# EAGLE board p2b-001 (EAGLE 9.6.2)
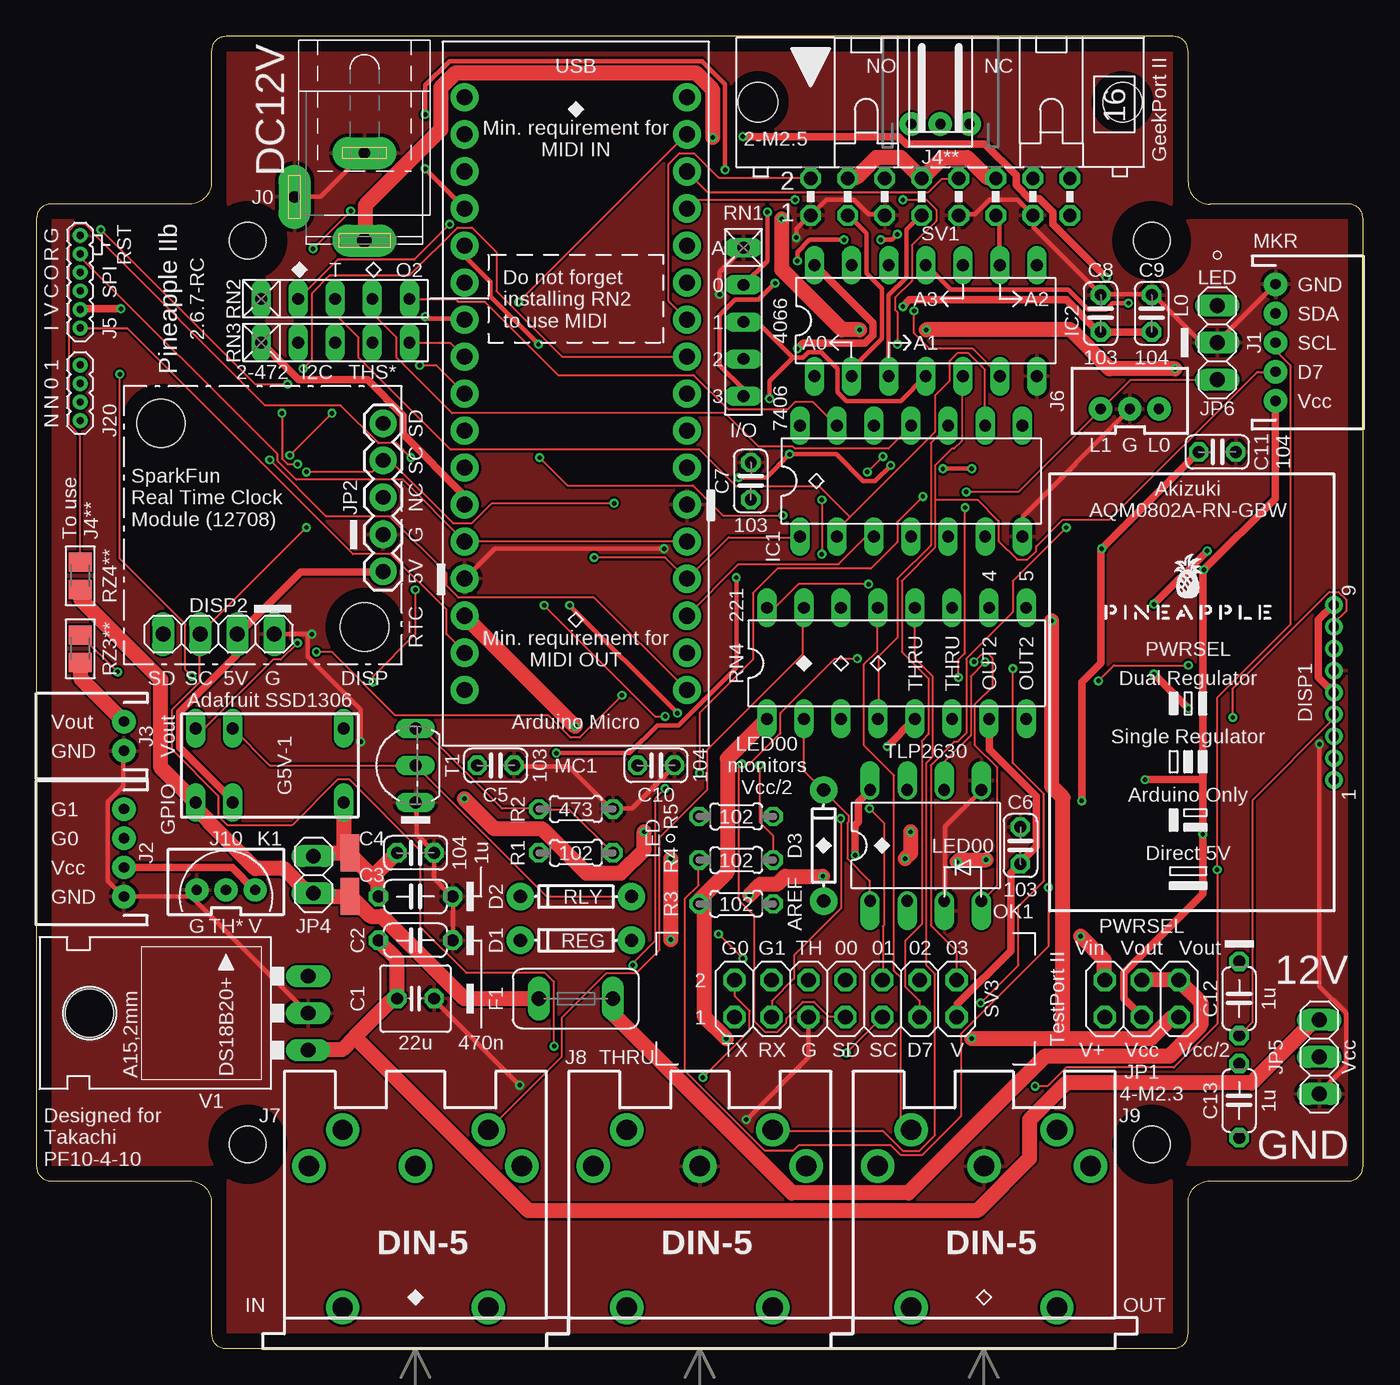
[diagram p0: board, top side]
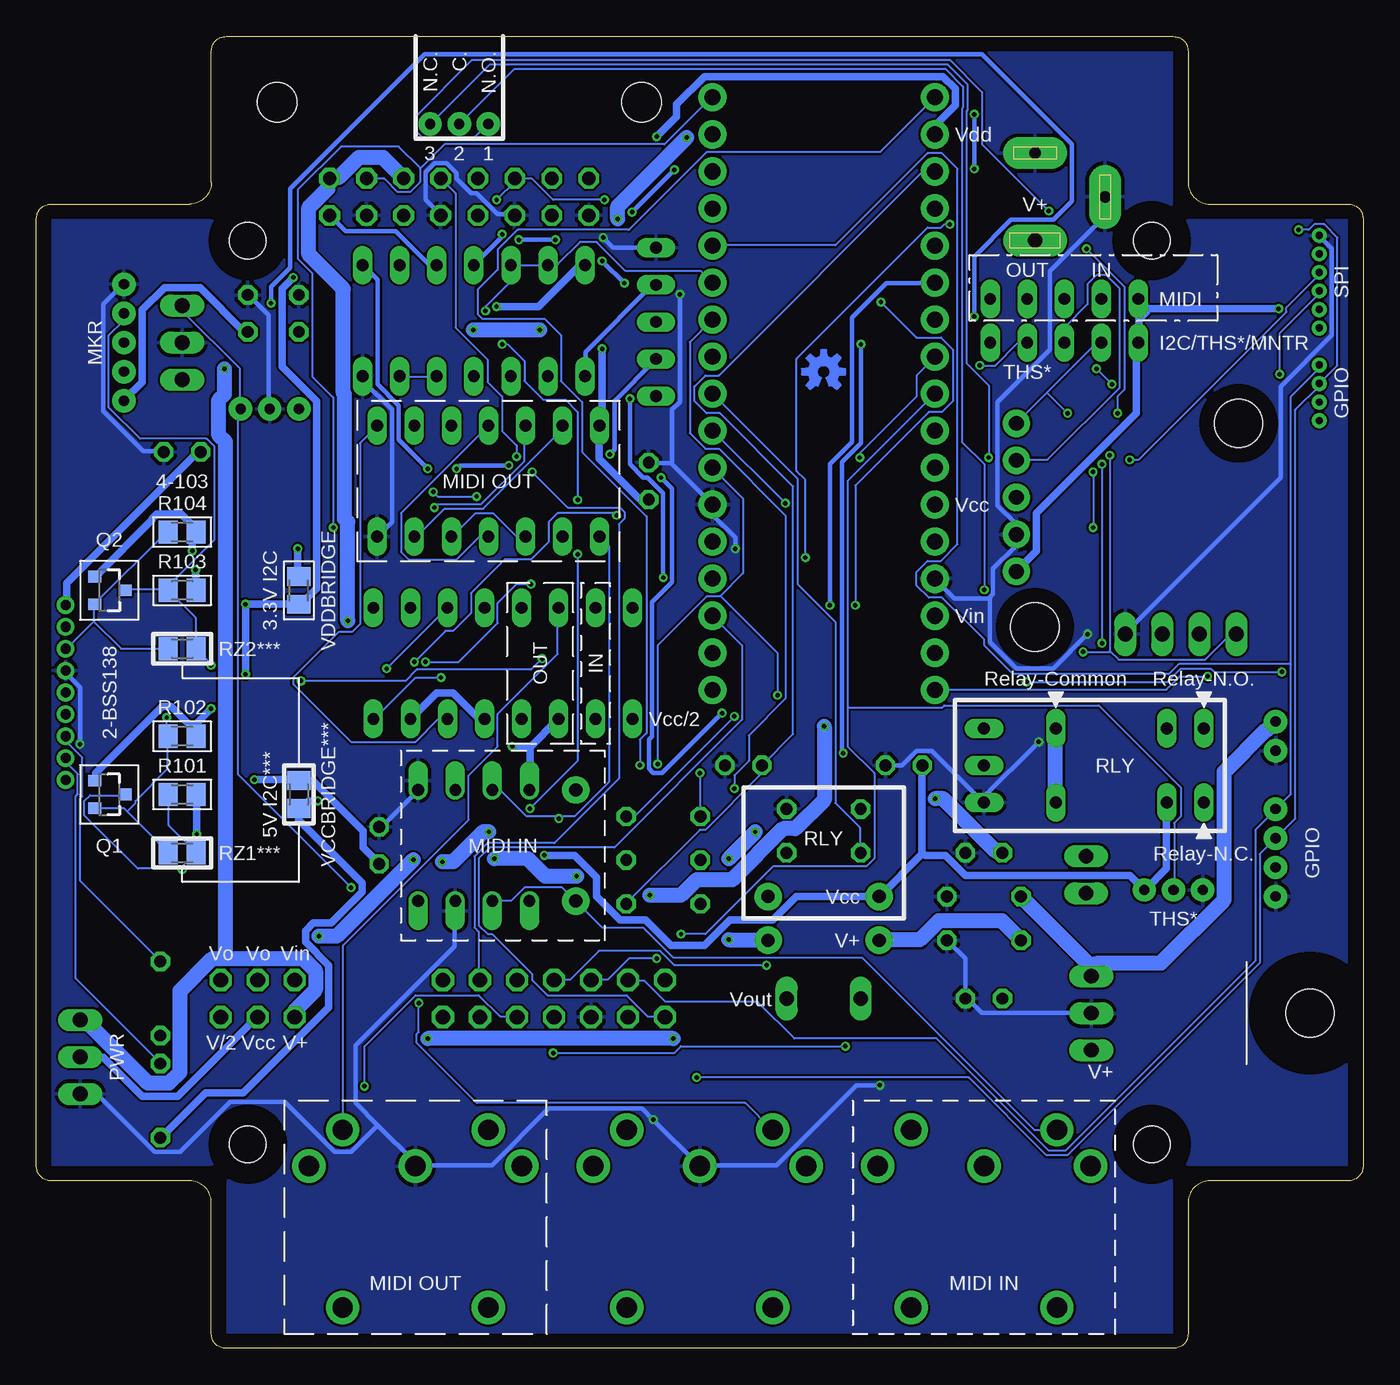
[diagram p1: board, bottom side, seen from below]

Size 91 x 90 mm. Coordinates in mm from the lower left corner, seen from the top.
Outline: 78,90 13,90 arc90 12,89 12,80 arc-90 10.5,78.5 1,78.5 arc90 0,77.5 0,12.5 arc90 1,11.5 10.5,11.5 arc-90 12,10 12,1 arc90 13,0 78,0 arc90 79,1 79,10 arc-90 80.5,11.5 90,11.5 arc90 91,12.5 91,77.5 arc90 90,78.5 80.5,78.5 arc-90 79,80 79,89 arc90 78,90
Copper layers (1*16): Top 0.035mm / dielectric 1.5mm / Bottom 0.035mm
Design rules "SeeedStudio_2layer_DRU_no_angle_20140221": minimum track width 6mil, minimum drill 12mil, track to track 6mil, track to pad 6mil, pad to pad 6mil, via to via 6mil, smd to smd 0mil, copper to edge 10mil, drill to drill 10mil, minimum pad ring 10mil, minimum via ring 6mil, stop-mask expansion 2mil, vias tented up to drill 100mil, thermal gap 10mil
Net classes: 0 default: width 0.152 mm, drill 0.152 mm, clearance 0.152 mm; 1 gnd: width 0.305 mm, drill 0.152 mm, clearance 0.152 mm; 2 power: width 0.508 mm, drill 0.152 mm, clearance 0.152 mm; 3 analog: width 0.305 mm, drill 0.152 mm, clearance 0.152 mm; 4 superpower: width 1.016 mm, drill 0.152 mm, clearance 0.152 mm
Holes 2.5 mm at 76.5,76 14.5,76 14.5,14 76.5,14
Holes 2.7 mm at 74.5,85.5 49.5,85.5
tRestrict: area 11.9,73.4 to 17.1,78.6; area 73.9,73.4 to 79.1,78.6; area 11.9,11.4 to 17.1,16.6; area 73.9,11.4 to 79.1,16.6; area 12,89 to 79,90; area 90,11.5 to 91,78.5; area 12,0 to 79,1; area 0,11.5 to 1,78.5; area 0,77.5 to 12,78.5; area 12,78.5 to 13,90; area 78,78.5 to 79,90; area 79,77.5 to 91,78.5; 12 more areas
bRestrict: area 11.9,11.4 to 17.1,16.6; area 73.9,11.4 to 79.1,16.6; area 73.9,73.4 to 79.1,78.6; area 11.9,73.4 to 17.1,78.6; area 78,0 to 79,11.5; area 79,11.5 to 91,12.5; area 90,11.5 to 91,78.5; area 79,77.5 to 91,78.5; area 78,78.5 to 79,90; area 12,89 to 79,90; area 12,78.5 to 13,90; area 0,77.5 to 12,78.5; 12 more areas

## Footprints (pad centres in the part's own frame; a part is rotated, then mirrored left to right if it is on the bottom)
SMD1,27-2,54 = smd 1.27 x 2.54: 1 0,0
C025-050X050 = drill 0.813 octagon: 1 -1.27,0; 2 1.27,0
C050-024X044 = drill 0.813 octagon: 1 -2.54,0; 2 2.54,0
C025-024X044 = drill 0.813 octagon: 1 -1.27,0; 2 1.27,0
DIODE-1N4148 = drill 0.9 pad 1.88: A -3.81,0; C 3.81,0
AQM0802A-RN-GBW-FOOTPRINT = drill 0.7 pad 1: 1 -6,0; 2 -4.5,0; 3 -3,0; 4 -1.5,0; 5 0,0; 6 1.5,0; 7 3,0; 8 4.5,0; 9 6,0
1X04 = drill 1.016 long: 1 -3.81,0; 2 -1.27,0; 3 1.27,0; 4 3.81,0
TE5 = drill 1.016 long: 1 -2.54,0; 2 2.54,0
STAND-OFF = hole 3.302: 0,0
DIL14 = drill 0.813 long: 1 -7.62,-3.81; 2 -5.08,-3.81; 3 -2.54,-3.81; 4 0,-3.81; 5 2.54,-3.81; 6 5.08,-3.81; 7 7.62,-3.81; 8 7.62,3.81; 9 5.08,3.81; 10 2.54,3.81; 11 0,3.81; 12 -2.54,3.81; 13 -5.08,3.81; 14 -7.62,3.81
SPC4077 = drill 0.8 pad 2.184 long: 1 -3,0; 2 0,-4.8 | drill 1 pad 2.184 long: 3 3,0
JST-5-PTH = drill 0.7 pad 1.6: 1 -4,0; 2 -2,0; 3 0,0; 4 2,0; 5 4,0
JST-4-PTH = drill 0.7 pad 1.6: 1 -3,0; 2 -1,0; 3 1,0; 4 3,0
JST-2-PTH = drill 0.7 pad 1.6: 1 -1,0; 2 1,0
JST-3-PTH-NS = drill 0.7 pad 1.6: 1 -2,0; 2 0,0; 3 2,0
1X06_1.27MM = drill 0.508 pad 1: 1 0,0; 2 1.27,0; 3 2.54,0; 4 3.81,0; 5 5.08,0; 6 6.35,0
JST-3-PTH-VERT = drill 0.7 pad 1.6: 1 -2,-0.55; 2 0,-0.55; 3 2,-0.55
DIN5-RA-PTH = drill 1.4 pad 2.286: 1 7.3,12.5; 2 0,12.5; 3 -7.3,12.5; 4 5,15; 5 -5,15; 6 -5,2.8; 7 5,2.8
1X04_1.27MM = drill 0.508 pad 1: 1 0,0; 2 1.27,0; 3 2.54,0; 4 3.81,0
2X03 = drill 1.016 octagon: 1 -2.54,-1.27; 2 -2.54,1.27; 3 0,-1.27; 4 0,1.27; 5 2.54,-1.27; 6 2.54,1.27
1X05 = drill 1.016 pad 1.88: 1 0,0; 2 2.54,0; 3 5.08,0; 4 7.62,0; 5 10.16,0
1X02 = drill 1.016 long: 1 -1.27,0; 2 1.27,0
1X03 = drill 1.016 long: 1 -2.54,0; 2 0,0; 3 2.54,0
G5V1 = drill 0.813 long: 1 -5.08,-2.54; 2 -2.54,-2.54; 5 5.08,-2.54; 6 5.08,2.54; 9 -2.54,2.54; 10 -5.08,2.54
ARDUINOMICRO = drill 1.1 pad 1.93: P$1 -20.32,7.62; P$2 -17.78,7.62; P$3 -15.24,7.62; P$4 -12.7,7.62; P$5 -10.16,7.62; P$6 -7.62,7.62; P$7 -5.08,7.62; P$8 -2.54,7.62; P$9 0,7.62; P$10 2.54,7.62; P$11 5.08,7.62; P$12 12.7,-7.62; P$13 10.16,-7.62; P$14 12.7,7.62; P$15 15.24,7.62; P$16 17.78,7.62; P$17 20.32,7.62; P$18 20.32,-7.62; P$19 17.78,-7.62; P$20 15.24,-7.62; P$21 7.62,7.62; P$22 10.16,7.62; P$23 7.62,-7.62; P$24 5.08,-7.62; P$25 2.54,-7.62; P$26 0,-7.62; P$27 -2.54,-7.62; P$28 -5.08,-7.62; P$29 -7.62,-7.62; P$30 -10.16,-7.62; P$31 -12.7,-7.62; P$32 -15.24,-7.62; P$33 -17.78,-7.62; P$34 -20.32,-7.62
DIL08 = drill 0.813 offset: 1 -3.81,-3.81; 2 -1.27,-3.81; 3 1.27,-3.81; 4 3.81,-3.81; 5 3.81,3.81; 6 1.27,3.81; 7 -1.27,3.81; 8 -3.81,3.81
SOT23-3 = smd 0.8 x 0.9: 1 -0.95,-1; 2 0.95,-1; 3 0,1.1
0204/5 = drill 0.813 octagon: 1 -2.54,0; 2 2.54,0
M2012 = smd 1.3 x 1.6: 1 -0.95,0; 2 0.95,0
RN-5 = drill 0.813 long: 1 -5.08,0; 2 -2.54,0; 3 0,0; 4 2.54,0; 5 5.08,0
DIL16 = drill 0.813 long: 1 -8.89,-3.81; 2 -6.35,-3.81; 3 -3.81,-3.81; 4 -1.27,-3.81; 5 1.27,-3.81; 6 3.81,-3.81; 7 6.35,-3.81; 8 8.89,-3.81; 9 8.89,3.81; 10 6.35,3.81; 11 3.81,3.81; 12 1.27,3.81; 13 -1.27,3.81; 14 -3.81,3.81; 15 -6.35,3.81; 16 -8.89,3.81
ML16L = drill 0.914 octagon: 1 -8.89,-1.27; 2 -8.89,1.27; 3 -6.35,-1.27; 4 -6.35,1.27; 5 -3.81,-1.27; 6 -3.81,1.27; 7 -1.27,-1.27; 8 -1.27,1.27; 9 1.27,-1.27; 10 1.27,1.27; 11 3.81,-1.27; 12 3.81,1.27; 13 6.35,-1.27; 14 6.35,1.27; 15 8.89,-1.27; 16 8.89,1.27
2X07 = drill 1.016 octagon: 1 -7.62,-1.27; 2 -7.62,1.27; 3 -5.08,-1.27; 4 -5.08,1.27; 5 -2.54,-1.27; 6 -2.54,1.27; 7 0,-1.27; 8 0,1.27; 9 2.54,-1.27; 10 2.54,1.27; 11 5.08,-1.27; 12 5.08,1.27; 13 7.62,-1.27; 14 7.62,1.27
TO92-ECB = drill 0.813 long: B 2.54,0; C 0,0; E -2.54,0
78XXL = drill 1.016 long: GND 0,-3.81; IN -2.54,-3.81; OUT 2.54,-3.81 | hole 3.302: 0,11.176

## Placement (x,y rotation side)
A  [SMD1,27-2,54]  21.5,31 0 top
B  [SMD1,27-2,54]  21.5,34 0 top
C1  22u  [C025-050X050]  26,24 0 top
C2  470n  [C050-024X044]  26,28 0 top
C3  1u  [C050-024X044]  26,31 0 top
C4  100n  [C025-024X044]  26,34 0 top
C5  10n  [C025-024X044]  31.5,40 0 top
C6  10n  [C025-024X044]  67.5,34.5 90 top
C7  10n  [C025-024X044]  49,59.5 90 top
C8  10n  [C025-024X044]  73,71 90 top
C9  100n  [C025-024X044]  76.5,71 90 top
C10  100n  [C025-024X044]  42.5,40 0 top
C11  100n  [C025-024X044]  81,61.5 0 top
C12  1u  [C050-024X044]  82.5,24 90 top
C13  1u  [C050-024X044]  82.5,17 90 top
D1  [DIODE-1N4148]  37,28 180 top
D2  [DIODE-1N4148]  37,31 180 top
D3  [DIODE-1N4148]  54,34.5 90 top
DISP1  AQM0802A-RN-GBW  [AQM0802A-RN-GBW-FOOTPRINT]  89,45 90 top
DISP2  MNTR  [1X04]  12.5,49 180 top
F1  1.8A  [TE5]  37,24 0 top
H1  STAND-OFF  [STAND-OFF]  22.51,49.49 0 top
H2  STAND-OFF  [STAND-OFF]  8.54,63.46 0 top
IC1  74LS06N  [DIL14]  60,59.5 0 top
IC2  4066N  [DIL14]  61,70.5 0 top
J0  [SPC4077]  22.5,79 270 top
J1  MKR  [JST-5-PTH]  85,69 270 top
J2  GPIO  [JST-4-PTH]  6,34 90 top
J3  Vcc  [JST-2-PTH]  6,42 90 top
J4**  RLY2  [JST-3-PTH-NS]  62,84 0 top
J5  SPI  [1X06_1.27MM]  3,70 90 top
J6  LED  [JST-3-PTH-VERT]  75,65 0 top
J7  DIN5  [DIN5-RA-PTH]  26,0 0 top
J8  DIN5  [DIN5-RA-PTH]  45.5,0 0 top
J9  DIN5  [DIN5-RA-PTH]  65,0 0 top
J10  1-Wire  [JST-3-PTH-VERT]  13,32 0 top
J20  [1X04_1.27MM]  3,63.65 90 top
JP1  PWRSEL  [2X03]  75.82,24 0 top
JP2  RTC  [1X05]  23.78,53.3 90 top
JP4  RLYJMP  [1X02]  19,32.5 90 top
JP5  PWR  [1X03]  88,20 90 top
JP6  LED  [1X03]  81,69 90 top
K1  G5V1  [G5V1]  16,40 0 top
LOGO1  OSHW-LOGOS-COPPER  [OSHW-LOGO-S_COPPER]  37,67 0 bottom
MC1  ARDUINOMICRO  [ARDUINOMICRO]  37,65.5 270 top
OK1  HCPL2630  [DIL08]  61,34.5 0 top
Q1  220mA/50V/3.5Ω  [SOT23-3]  86,38 270 bottom
Q2  220mA/50V/3.5Ω  [SOT23-3]  86,52 270 bottom
R1  1k  [0204/5]  37,34 180 top
R2  47k  [0204/5]  37,37 180 top
R3  1k  [0204/5]  48,30.5 180 top
R4  1k  [0204/5]  48,33.5 0 top
R5  1k  [0204/5]  48,36.5 0 top
R101  10k  [M2012]  81,38 0 bottom
R102  10k  [M2012]  81,42 0 bottom
R103  10k  [M2012]  81,52 0 bottom
R104  10k  [M2012]  81,56 0 bottom
RN1  10k  [RN-5]  48.5,70.42 270 top
RN2  4.7k  [RN-5]  20.5,72 0 top
RN3  4.7k  [RN-5]  20.5,69 0 top
RN4  220  [DIL16]  59,47 0 top
RZ1***  Inf  [M2012]  81,34 180 bottom
RZ2***  Inf  [M2012]  81,48 180 bottom
RZ3**  Inf  [M2012]  3,48 90 top
RZ4**  Inf  [M2012]  3,53 90 top
SV1  [ML16L]  62,79 0 top
SV3  Testport II  [2X07]  55.5,24 0 top
T1  2SC1815  [TO92-ECB]  26,40 90 top
U$1  PINEAPPLE450_SILK  [PINEAPPLE450_SILK]  79,50 0 top
V1  5V  [78XXL]  14.82,23 90 top
VCCBRIDGE***  Inf  [M2012]  73,38 90 bottom
VDDBRIDGE  0  [M2012]  73,52 270 bottom

## Library data of the parts
A B = wirepad
C1-C4 C10-C13 = rcl; SPICEPREFIX: C
C5-C9 R1-R5 = resistor
D1-D3 = SparkFun-DiscreteSemi; PROD_ID: DIO-08378
DISP1 = AQM0802A-RN-GBW
DISP2 JP1 JP4-JP6 SV3 = pinhead
F1 = fuse; OC_FARNELL: unknown; OC_NEWARK: unknown
H1 H2 = SparkFun-Hardware
IC1 = 74xx-us
IC2 = 40xx
J0 = con-jack; OC_FARNELL: unknown; OC_NEWARK: unknown
J1 = SparkFun-Connectors; SF_ID: PRT-09917
J2 = SparkFun-Connectors; PROD_ID: WIRE-13531; SF_ID: PRT-09916
J3 = SparkFun-Connectors; PROD_ID: CONN-09863; SKU: PRT-09914
J4** J5 J20 JP2 = SparkFun-Connectors
J6 J10 = SparkFun-Connectors; PROD_ID: CONN-13230
J7-J9 = SparkFun-Connectors; PROD_ID: CONN-09481
K1 = relay; MPN: G5V-1-DC24; OC_FARNELL: 9949593; OC_NEWARK: 36M6377
LOGO1 = SparkFun-Aesthetics
MC1 = adafruit
OK1 = optocoupler; MF: AGILENT TECHNOLOGIES; MPN: HCPL-2630-000E; OC_FARNELL: 9994904; OC_NEWARK: 88H7813
Q1 Q2 = SparkFun-DiscreteSemi; PROD_ID: TRANS-00830
R101-R104 RZ1*** RZ2*** RZ3** RZ4** VCCBRIDGE*** VDDBRIDGE = rcl; SPICEPREFIX: R
RN1-RN3 = resistor-net; OC_FARNELL: unknown; OC_NEWARK: unknown
RN4 = resistor-dil; OC_FARNELL: unknown; OC_NEWARK: unknown
SV1 = con-ml; OC_FARNELL: unknown; OC_NEWARK: unknown
T1 = transistor
U$1 = pineapple
V1 = v-reg

## Nets
ANLG0 [analog]: IC2.1 MC1.P$31 RN1.2
ANLG0R [analog]: IC2.2 SV1.3
ANLG1 [analog]: IC2.4 MC1.P$30 RN1.3
ANLG1R [analog]: IC2.3 SV1.7
ANLG2 [analog]: IC2.8 MC1.P$29 RN1.4
ANLG2R [analog]: IC2.9 SV1.11
ANLG3 [analog]: IC2.11 MC1.P$28 RN1.5
ANLG3R [analog]: IC2.10 SV1.15
AREF: C10.1 MC1.P$32 R3.1
CAP1N: C12.2 DISP1.3
CAP1P: C12.1 DISP1.4
D7GATE: IC2.5 IC2.6 IC2.12 IC2.13 J1.4 MC1.P$6 SV3.11
DTCT0: MC1.P$7 SV1.2 SV3.8
DTCT1: MC1.P$4 SV1.6 SV3.10
DTCT2: MC1.P$3 SV1.10 SV3.12
DTCT3: MC1.P$1 SV1.14 SV3.14
GND [gnd]: C1.2 C2.2 C3.2 C4.2 C5.2 C6.2 C7.2 C8.2 C9.2 C10.2 C11.2 DISP1.6 DISP2.1 IC1.7 IC2.7 J0.1 J0.2 J1.1 J2.1 J3.1 J5.6 J6.2 J8.2 J9.2 J10.1 JP2.2 JP5.1 JP6.2 MC1.P$12 MC1.P$21 OK1.3 OK1.5 R2.1 RN1.1 SV1.1 SV1.5 SV1.9 SV1.13 SV3.5 T1.E V1.GND
GPIO0: J2.3 J20.3 MC1.P$8 SV3.2
GPIO1: J2.4 J20.4 MC1.P$5 SV3.4
LCDVOUT: C13.2 DISP1.2
LED0: MC1.P$34 R4.2
LED0A: J6.3 JP6.3 R4.1
LED1: MC1.P$2 R5.2
LED1A: J6.1 JP6.1 R5.1
MIDIINSND: D3.C OK1.1 RN4.2
MIRTN: D3.A J7.5 OK1.2
MISND: J7.4 RN4.15
MISO: J5.1 MC1.P$19
MNTR: MC1.P$27 OK1.6 RN3.5
MNTRA: OK1.4 RN4.16
MO2RTN: RN4.9
MO2RTNRAW: IC1.12 RN4.8
MO2SND: RN4.10
MORTN: J9.5 RN4.13
MORTNRAW: IC1.10 RN4.4
MOSI: J5.4 MC1.P$17
MOSND: J9.4 RN4.14
MTRTN: J8.5 RN4.11
MTRTNRAW: IC1.8 RN4.6
MTSND: J8.4 RN4.12
NMO2RTN: IC1.6 IC1.13 RN2.5
NMORTN: IC1.4 IC1.11 RN2.4
NMTRTN: IC1.2 IC1.9 RN2.3
RLY: MC1.P$9 R1.2
RLYDRV: R1.1 R2.2 T1.B
RLYOUT: J4**.1 K1.10
RLYOUT1: J4**.2 RZ3**.2
RLYOUT2: J4**.3 RZ4**.2
RLYSNK: D2.A K1.9 T1.C
RST: J5.5 MC1.P$13 MC1.P$22
RX: IC1.1 MC1.P$14 OK1.7 RN2.2 SV3.3
SCK: J5.3 MC1.P$18
SCL: DISP2.3 J1.3 JP2.4 MC1.P$10 Q1.3 R101.1 RN3.3 RZ1***.1 SV3.9
SCL3V: DISP1.8 Q1.2 R102.1 RZ1***.2
SDA: DISP2.4 J1.2 JP2.5 MC1.P$11 Q2.3 R103.1 RN3.2 RZ2***.1 SV3.7
SDA3V: DISP1.7 Q2.2 R104.1 RZ2***.2
THS: J10.2 MC1.P$26 RN3.4 SV3.6
TX: IC1.3 IC1.5 MC1.P$15 SV3.1
V+ [superpower]: C1.1 C2.1 D1.C J0.3 JP1.1 JP5.3 V1.IN
VCC [power]: C5.1 C6.1 C7.1 C8.1 C9.1 D2.C DISP2.2 IC1.14 IC2.14 J1.5 J2.2 J5.2 J10.3 JP1.3 JP2.1 JP5.2 K1.2 MC1.P$23 OK1.8 R101.2 R103.2 RN2.1 RN3.1 RN4.3 RN4.5 RN4.7 SV3.13 VCCBRIDGE***.2
VCC/2 [superpower]: JP1.5 R3.2 RN4.1 SV1.4 SV1.8 SV1.12 SV1.16
VCC/VDD [power]: C11.1 C13.1 DISP1.5 DISP1.9 VCCBRIDGE***.1 VDDBRIDGE.1
VDD [power]: MC1.P$33 Q1.1 Q2.1 R102.2 R104.2 VDDBRIDGE.2
VIN [superpower]: JP1.2 MC1.P$20
VOUT [superpower]: F1.2 JP1.4 JP1.6
VOUTRAW [superpower]: B.1 C3.1 C4.1 D1.A J3.2 JP4.2 K1.5 K1.6 RZ3**.1 V1.OUT
VOUTRAW2 [superpower]: A.1 F1.1 JP4.1 K1.1 RZ4**.1

## Tracks (layer width: path | path; a pad name or v marks a point on that pad's centre or on a via)
ANLG0  (via drill 0.3)
  Top 0.305: v26.67,80.92 29.34,78.26 MC1.P$31 | v26.67,84.66 26.67,86.64 28.35,88.32 45.64,88.32 47.24,86.72 v47.24,80.85 | v50.14,77.95 50.14,74.6 48.54,73 RN1.2
  Bottom 0.305: RN1.2 48.54,72.92 48.77,72.92 53.34,68.35 53.34,66.75 IC2.1 | v26.67,84.66 v26.67,80.92 | v50.14,77.95 v47.24,80.85
ANLG0R
  Top 0.305: IC2.2 55.93,66.75 55.93,67.21 57.99,69.27 57.99,72.69 56.92,73.76 56.92,76.5 55.7,77.72 SV1.3
ANLG1  (via drill 0.3)
  Top 0.305: 51.89,67.97 49.45,70.41 48.54,70.41 RN1.3 | 51.89,67.97 52.58,67.97 52.96,68.35 53.8,68.35 54.94,67.21 54.94,65.61 55.55,65 59.28,65 60.96,66.67 IC2.4 | v34.44,68.89 31.17,72.16 31.17,73.15 29.41,74.91 29.41,75.59 MC1.P$30 | v35.66,40.84 40.69,40.84 42.6,42.75 44.04,42.75 48.01,46.71 v48.01,52.88 | v50.29,65.15 50.29,66.37 51.89,67.97
  Bottom 0.305: v34.44,68.89 34.44,62.1 35.74,60.81 35.74,40.92 v35.66,40.84 | v48.01,52.88 48.01,58.67 49.07,59.74 49.38,59.74 50.29,60.66 v50.29,65.15
ANLG1R
  Top 0.305: IC2.3 58.45,66.75 58.45,72.24 59.66,73.46 59.66,76.73 60.66,77.72 SV1.7
ANLG2  (via drill 0.3)
  Top 0.305: v58.6,60.58 57.53,59.51 56.69,59.51 54.86,61.34 v51.66,61.34 50.06,59.74 v48.16,59.74 | v64.16,60.35 v62.18,60.35 | v43.97,43.59 v36.58,50.98
  Bottom 0.305: v51.66,61.34 51.36,61.65 51.36,65 48.54,67.82 RN1.4 | v58.6,60.58 61.95,60.58 v62.18,60.35 | v64.16,60.35 66.14,62.33 66.14,64.69 67.59,66.14 67.59,73.3 68.58,74.3 IC2.8 | v36.58,50.98 36.58,60.66 35.05,62.18 35.05,70.71 32.69,73.08 29.41,73.08 MC1.P$29 | v43.97,43.59 48.08,39.47 48.69,39.47 49,39.78 49,41.76 48.77,41.99 48.77,51.21 47.4,52.58 47.4,58.98 v48.16,59.74
ANLG2R
  Top 0.305: IC2.9 66.06,74.37 66.06,77.5 65.84,77.72 SV1.11
ANLG3  (via drill 0.3)
  Top 0.305: v50.67,73.08 49.53,71.93 47.93,71.93 46.86,70.87 46.86,67.44 48.46,65.84 48.46,65.38 RN1.5 | v52.2,74.6 52.2,75.21 53.03,76.05 v55.4,76.05 | v57.91,76.05 58.67,76.05 v59.05,76.43 | v26.67,70.79 26.82,70.64 29.34,70.64 MC1.P$28 | v74.91,71.7 73.84,71.7 73.38,71.25 72.16,71.25 70.79,72.62 62.71,72.62 61.04,74.3 IC2.11
  Bottom 0.305: v52.2,74.6 v50.67,73.08 | v57.91,76.05 v55.4,76.05 | v59.05,76.43 59.05,76.28 60.96,74.37 IC2.11 | v26.67,70.79 26.67,74.91 24.16,77.42 21.26,77.42 19.96,78.72 19.96,82.6 26.14,88.77 64.39,88.77 73.61,79.55 73.61,74.14 74.91,72.85 v74.91,71.7
ANLG3R
  Bottom 0.305: IC2.10 63.55,74.37 64.08,74.37 66.37,76.66 69.8,76.66 70.87,77.72 SV1.15
AREF
  Bottom 0.152: R3.1 50.52,30.56 45.49,35.59 45.11,35.59 41.3,39.4 41.3,39.93 C10.1 39.09,42.14 39.09,59.13 44.12,64.16 45.03,64.16 45.87,65 45.87,65.99 45.11,66.75 44.2,66.75 30.25,80.7 29.41,80.7 MC1.P$32
CAP1N
  Bottom 0.152: DISP1.3 88.92,41.99 88.92,41.6 87.86,40.54 87.86,37.87 88.01,37.72 88.01,32.08 82.53,26.59 C12.2
CAP1P
  Top 0.152: DISP1.4 88.92,43.43 88.92,43.13 83.44,37.64 83.44,22.4 82.53,21.49 C12.1
D7GATE  (via drill 0.3)
  Top 0.152: 61.65,58.22 61.65,60.58 62.79,61.72 62.94,61.72 63.48,62.26 63.48,66.67 IC2.5 | 61.65,58.22 61.65,54.94 59.36,52.65 59.36,47.78 61.19,45.95 61.19,42.14 60.73,41.68 60.73,29.11 59.59,27.96 59.59,24.84 60.58,23.85 60.58,22.78 SV3.11 | 61.65,58.22 64.54,58.22 65.99,56.77 65.99,55.4 67.28,54.1 67.97,54.1 68.58,54.71 68.58,55.02 70.41,56.84 73.61,56.84 83.74,66.98 84.96,66.98 J1.4 | v60.2,71.17 60.2,69.65 61.27,68.58 64.24,68.58 66.06,66.75 IC2.6
  Bottom 0.152: MC1.P$6 44.65,73.15 45.41,73.91 50.6,73.91 52.58,75.89 53.72,75.89 55.24,74.37 55.85,74.37 IC2.13 55.93,74.3 58.45,74.3 IC2.12 58.45,74.22 58.45,73.23 60.2,71.48 v60.2,71.17 | IC2.5 63.55,66.67 66.06,66.67 IC2.6
DTCT0  (via drill 0.3)
  Top 0.152: SV1.2 53.03,80.31 46.79,80.31 45.11,81.99 44.12,81.99 43.36,81.23 43.36,71.86 44.58,70.64 MC1.P$7 | v40.92,26.29 40.92,26.44 42.44,27.96 42.44,37.72 v43.13,38.41
  Bottom 0.152: v40.92,26.29 47.24,26.29 48.23,27.28 52.43,27.28 54.41,25.3 55.47,25.3 SV3.8 | v43.13,38.41 43.13,39.32 42.14,40.31 42.14,42.06 39.62,44.58 39.62,57.15 44.2,61.72 45.11,61.72 46.18,62.79 46.18,69.04 44.65,70.56 MC1.P$7
DTCT1  (via drill 0.3)
  Top 0.152: v52.05,78.79 45.19,78.79 44.65,78.26 MC1.P$4 | v57.15,37.03 58.14,36.04 58.14,29.03 58.06,28.96 58.06,25.3 SV3.10 | v53.87,58.22 v53.87,54.48 | v59.05,68.89 59.05,71.09 58.9,71.25 58.9,72.08 60.05,73.23 60.05,75.67 61.72,77.34 61.72,78.11 61.04,78.79 v59.44,78.79
  Bottom 0.152: v52.05,78.79 55.55,78.79 57,80.24 58.14,80.24 SV1.6 58.14,80.16 58.14,80.09 v59.44,78.79 | v57.15,37.03 53.87,40.31 v53.87,54.48 | v53.87,58.22 53.87,64.24 54.71,65.08 56.24,65.08 57.53,66.37 57.53,67.74 58.67,68.89 v59.05,68.89
DTCT2  (via drill 0.3)
  Top 0.152: SV1.10 63.25,80.24 62.1,80.24 61.19,79.32 46.02,79.32 44.65,80.7 MC1.P$3 | v58.06,61.19 v57,60.12
  Bottom 0.152: v57,60.12 54.56,57.68 50.98,57.68 50.67,57.38 50.67,56.92 51.05,56.54 51.05,39.09 55.47,34.67 60.05,34.67 60.96,33.76 60.96,28.88 60.66,28.57 60.66,25.3 SV3.12 | v58.06,61.19 58.06,61.95 59.05,62.94 59.05,65.3 60.05,66.29 60.05,67.82 62.26,70.03 62.26,79.25 63.25,80.24 SV1.10
DTCT3  (via drill 0.3)
  Top 0.152: v70.64,56.31 66.98,52.65 66.98,50.52 63.78,47.32 63.78,42.22 63.17,41.6 62.94,41.6 61.34,40.01 61.34,29.03 63.09,27.28 63.09,25.3 SV3.14
  Bottom 0.152: 64.66,80.96 63.02,82.6 47.93,82.6 44.65,85.88 MC1.P$1 | 64.66,80.96 64.69,80.92 64.69,80.01 65.38,79.32 66.22,79.32 67.13,80.24 68.28,80.24 SV1.14 | v70.64,56.31 70.64,65.23 72.08,66.67 72.08,73.76 73.08,74.75 73.08,79.48 70.1,82.45 66.14,82.45 64.66,80.96
GND  (via drill 0.3)
  Top 0.305: v88.01,41.45 88.01,24.84 89.84,23.01 89.84,19.36 88.01,17.53 JP5.1 | OK1.3 62.33,30.71 62.33,35.81 64.77,38.25 OK1.5 | v48.69,15.7 52.96,19.96 52.96,22.71 SV3.5 | v52.12,76.2 52.12,76.81 53.03,77.72 SV1.1 53.19,77.8 54.18,78.79 56.08,78.79 57.07,77.8 58.14,77.8 SV1.5 | v46.86,72.31 46.86,73.84 48.46,75.44 RN1.1 | IC1.7 67.67,55.7 67.67,57.07 74.98,64.39 J6.2 | SV1.9 63.32,77.8 64.39,77.8 65.38,78.79 67.28,78.79 68.28,77.8 SV1.13 68.43,77.65 68.43,76.89 72.92,72.39 C8.2 73.08,72.31 76.43,72.31 C9.2 76.66,72.24 79.86,69.04 80.92,69.04 JP6.2 81.08,69.11 84.96,73 J1.1 | J3.1 5.94,41 5.94,38.56 4.88,37.49 4.88,32.08 5.87,31.09 J2.1 6.02,31.01 10.59,31.01 10.97,31.39 J10.1 10.67,30.94 18.59,23.01 V1.GND | C10.2 43.74,39.93 40.84,37.03 39.55,37.03 R2.1 39.4,37.03 36.5,39.93 32.84,39.93 C5.2 | C2.2 28.57,28.04 28.57,30.94 C3.2 28.42,31.09 27.28,32.23 27.28,33.98 C4.2 27.2,34.14 26.06,35.28 26.06,37.41 T1.E | J0.2 17.75,79.02 19.51,79.02 22.48,81.99 J0.1 | v18.9,49 18.59,49 | 18.59,49 16.38,49 DISP2.1 | v22.25,41.6 22.25,43.81 18.59,47.47 18.59,49 | v43.05,54.86 31.47,54.86 29.41,52.81 MC1.P$12 | v33.15,18.06 27.28,23.93 C1.2
  Bottom 0.305: v88.01,41.45 88.01,45.34 88.92,46.25 88.92,46.48 DISP1.6 | C6.2 67.44,35.81 67.28,35.81 64.85,38.25 OK1.5 | 67.59,15.32 65,12.72 J9.2 65,12.57 59.74,12.57 55.85,16.46 49.45,16.46 v48.69,15.7 45.57,12.57 J8.2 45.41,12.57 40.23,12.57 34.75,18.06 v33.15,18.06 | 67.59,15.32 69.11,16.84 69.11,20.8 62.33,27.58 62.33,30.63 OK1.3 | 67.59,15.32 69.42,13.49 70.56,13.49 73.99,16.92 77.72,16.92 81.15,13.49 82.91,13.49 86.87,17.45 87.94,17.45 JP5.1 | 47.47,60.73 49,60.73 C7.2 | 47.47,60.73 44.65,57.91 MC1.P$21 44.58,57.76 44.58,57.15 43.05,55.63 v43.05,54.86 | v52.12,76.2 51.44,75.51 48.54,75.51 RN1.1 | v46.86,72.31 46.86,64.92 47.4,64.39 47.4,60.81 47.47,60.73 | IC2.7 68.58,66.67 68.58,66.37 66.6,64.39 66.6,56.69 67.59,55.7 IC1.7 | C11.2 82.3,61.57 83.67,61.57 86.41,64.31 86.41,71.63 85.04,73 J1.1 | J6.2 75.06,64.47 75.06,70.87 76.43,72.24 C9.2 | SV1.5 58.22,77.8 59.36,77.8 60.81,79.25 61.19,79.25 62.18,80.24 62.18,80.62 62.87,81.31 63.7,81.31 64.31,80.7 64.31,78.79 63.32,77.8 SV1.9 | C2.2 28.5,27.96 27.28,26.75 C1.2 27.13,24 26.14,23.01 18.67,23.01 V1.GND | C5.2 31.62,40.01 30.63,41 29.57,41 26.06,37.49 T1.E 26.14,37.72 v22.25,41.6 | J5.6 2.97,76.28 2.13,75.44 2.13,69.49 5.64,65.99 5.64,59.74 16.31,49.07 DISP2.1 | 25.68,51.44 25.38,51.74 25.38,53.49 23.85,55.02 23.85,55.78 JP2.2 23.85,55.93 23.85,56.62 25.07,57.84 25.07,64.92 21.49,68.5 21.49,73.91 17.75,77.65 17.75,78.94 J0.2 | 25.68,51.44 28.04,51.44 29.34,52.73 MC1.P$12 | v18.9,49 21.26,46.63 23.77,46.63 25.6,48.46 25.6,51.36 25.68,51.44
  pour Top: -1,-1 92,-1 92,91 -1,91
  pour Bottom: -2,-2 93,-2 93,92 -2,92
GPIO0  (via drill 0.3)
  Top 0.152: v45.72,18.59 48.92,21.79 48.92,23.16 47.93,24.16 47.93,25.22 SV3.2 | v18.29,67.21 18.9,67.82 18.9,72.39 20.12,73.61 25.6,73.61 28.88,76.89 29.87,76.89 31.55,75.21 31.55,72.54 36.04,68.05 44.58,68.05 MC1.P$8 | v17.22,66.14 15.01,66.14 v4.42,76.73
  Bottom 0.152: v45.72,18.59 27.05,18.59 21.72,13.26 20.27,13.26 7.09,26.44 7.09,33.91 6.02,34.98 J2.3 5.94,35.05 4.65,36.35 4.65,64.39 3.05,65.99 3.05,66.14 J20.3 2.97,66.22 1.75,67.44 1.75,76.2 2.67,77.11 3.35,77.11 3.73,76.73 v4.42,76.73 | v17.22,66.14 v18.29,67.21
GPIO1
  Bottom 0.152: 4.95,46.94 4.95,38.02 5.94,37.03 J2.4 6.02,36.96 7.39,35.59 7.39,26.59 20.42,13.56 21.57,13.56 29.26,21.26 39.01,21.26 41.53,23.77 47.85,23.77 49.3,25.22 50.37,25.22 SV3.4 | 4.95,46.94 4.95,65.3 3.05,67.21 3.05,67.44 J20.4 | 4.95,46.94 12.65,46.94 13.34,46.25 24,46.25 25.98,48.23 25.98,48.62 28.88,51.51 29.79,51.51 30.63,52.35 30.63,53.26 29.87,54.03 28.96,54.03 27.81,55.17 27.81,80.92 28.88,81.99 29.87,81.99 36.2,75.67 44.58,75.67 MC1.P$5
LCDVOUT
  Bottom 0.152: DISP1.2 88.92,40.46 88.92,40.16 88.16,39.4 88.16,38.02 88.32,37.87 88.32,25.38 82.53,19.58 C13.2
LED0  (via drill 0.3)
  Top 0.152: v49.61,40.01 49.61,36.12 50.52,35.2 50.52,33.53 R4.2
  Bottom 0.152: v49.61,40.01 49.61,41.76 49.15,42.22 49.15,57.07 53.57,61.49 53.57,64.92 55.02,66.37 55.02,69.49 56.16,70.64 60.43,70.64 60.73,70.94 60.73,72.62 59.36,73.99 59.36,75.36 57.99,76.73 50.37,76.73 45.03,82.07 33.15,82.07 29.41,85.8 MC1.P$34
LED0A  (via drill 0.3)
  Top 0.152: v69.42,31.62 69.42,27.58 63.4,21.57 63.4,15.93 60.73,13.26 59.28,13.26 58.6,13.95 52.27,13.95 51.89,13.56 49.99,13.56 44.5,19.05 44.5,30.86 45.41,31.77 45.41,33.45 R4.1
  Bottom 0.152: v69.42,31.62 77.19,39.4 77.19,64.24 77.04,64.39 J6.3 77.04,64.47 77.04,67.21 80.92,71.09 80.92,71.48 JP6.3
LED1  (via drill 0.3)
  Top 0.152: v43.13,43.36 42.44,43.36 v34.82,50.98 | v33.07,71.78 44.58,83.29 MC1.P$2
  Bottom 0.152: v43.13,43.36 49.91,36.58 50.52,36.58 R5.2 | v34.82,50.98 34.82,59.21 29.79,64.24 28.88,64.24 28.12,65 28.12,68.5 28.96,69.34 30.63,69.34 v33.07,71.78
LED1A  (via drill 0.3)
  Top 0.152: v45.49,39.47 45.49,43.59 49.15,47.24 49.15,51.82 50.83,53.49 57.23,53.49 59.05,55.32 59.05,56.69 v60.81,58.45 | v63.78,58.75 67.36,58.75 73,64.39 J6.1 73.08,64.47 75.06,66.45 80.92,66.45 JP6.1
  Bottom 0.152: v45.49,39.47 45.49,36.58 R5.1 | v60.81,58.45 63.48,58.45 v63.78,58.75
MIDIINSND
  Top 0.152: RN4.2 52.65,43.13 52.65,39.62 53.95,38.33 D3.C 54.03,38.25 55.7,36.58 55.7,36.12 55.63,36.04 55.63,33.6 57.15,32.08 57.15,30.71 OK1.1
MIRTN
  Bottom 0.152: OK1.2 59.66,30.71 58.45,30.71 57.53,31.62 54.94,31.62 54.03,30.71 D3.A 53.95,30.63 52.2,28.88 49.38,28.88 47.32,26.82 34.37,26.82 22.55,15.01 21.03,15.01 J7.5
MISND
  Top 0.152: RN4.15 52.58,50.75 52.58,47.62 46.02,41.07 46.02,38.33 42.75,35.05 42.75,27.36 41.15,25.76 39.09,25.76 36.04,22.71 36.04,20.04 31.01,15.01 J7.4
MISO
  Top 0.152: J5.1 3.05,69.95 6.25,69.95 21.72,54.48 24.31,54.48 28.12,50.67 28.12,49 29.34,47.78 MC1.P$19
MNTR  (via drill 0.3)
  Top 0.152: v65.08,47.09 64.08,46.1 64.08,42.06 62.33,40.31 62.33,38.33 OK1.6 | v51.21,57.15 47.09,57.15 45.03,59.21 36.42,59.21 v34.52,61.11 | RN3.5 25.6,68.96 28.42,68.96 29.34,68.05 MC1.P$27
  Bottom 0.152: v65.08,47.09 62.94,49.23 62.41,49.23 61.19,50.44 61.19,51.82 58.9,54.1 57.07,54.1 55.85,55.32 55.85,56.69 55.24,57.3 51.36,57.3 v51.21,57.15 | v34.52,61.11 34.52,61.42 30.63,65.3 30.63,66.75 29.41,67.97 MC1.P$27
MNTRA  (via drill 0.3)
  Top 0.152: v57.07,52.43 52.27,52.43 50.67,50.83 50.14,50.83 RN4.16 | v64.31,47.09 64.85,47.62 65.3,47.62 65.61,47.32 65.61,45.41 64.39,44.2 64.39,41.38 65.91,39.85 65.91,31.77 64.85,30.71 OK1.4
  Bottom 0.152: v57.07,52.43 58.06,52.43 59.36,51.13 59.36,49.76 62.03,47.09 v64.31,47.09
MO2RTNRAW  (via drill 0.3)
  Top 0.152: v63.7,57.68 63.7,47.7 63.25,47.24 v63.25,46.02
  Bottom 0.152: v63.7,57.68 63.48,57.91 60.5,57.91 57.53,60.88 57.53,63.25 IC1.12 | v63.25,46.02 65,46.02 67.82,43.2 RN4.8
MORTN
  Top 0.152: RN4.13 57.68,50.75 57.68,47.85 56.77,46.94 56.77,41.38 58.83,39.32 58.83,25.91 59.28,25.45 59.28,15.7 59.97,15.01 J9.5
MORTNRAW
  Top 0.152: RN4.4 57.76,43.2 57.76,47.47 59.05,48.77 59.05,52.81 61.34,55.09 61.34,62.1 62.48,63.25 IC1.10
MOSI  (via drill 0.3)
  Top 0.152: v16,60.96 19.89,57.07 24.23,57.07 28.12,53.19 28.12,52.35 28.96,51.51 38.25,51.51 44.58,45.19 MC1.P$17
  Bottom 0.152: v16,60.96 15.39,60.96 5.26,71.09 5.26,71.4 3.05,73.61 3.05,73.76 J5.4
MOSND
  Bottom 0.152: RN4.14 55.24,50.75 55.24,47.62 59.36,43.51 59.36,41.3 61.34,39.32 61.34,36.27 69.95,27.66 69.95,15.01 J9.4
MTRTN  (via drill 0.3)
  Top 0.152: v66.98,46.63 66.98,40.16 69.11,38.02 69.11,32.08 67.36,30.33 67.36,26.29 v64.77,23.7
  Bottom 0.152: v66.98,46.63 62.87,50.75 RN4.11 | v64.77,23.7 64.77,21.72 64.92,21.57 64.92,20.95 60.81,16.84 42.37,16.84 40.54,15.01 J8.5
MTRTNRAW
  Bottom 0.152: RN4.6 62.87,43.13 63.48,43.13 65,41.6 69.42,41.6 73.38,45.57 73.38,46.02 70.26,49.15 69.34,49.15 68.81,49.68 68.81,62.1 67.67,63.25 IC1.8
MTSND
  Top 0.152: RN4.12 60.27,50.75 60.27,47.32 61.49,46.1 61.49,40.62 61.04,40.16 61.04,26.29 61.65,25.68 61.65,14.63 60.58,13.56 59.44,13.56 58.06,14.94 50.52,14.94 J8.4
NMO2RTN
  Top 0.152: RN2.5 25.6,71.93 28.8,71.93 28.96,71.78 30.79,71.78 35.81,66.75 45.11,66.75 47.47,64.39 51.51,64.39 52.05,64.92 53.26,64.92 54.86,63.32 IC1.13
  Bottom 0.152: IC1.13 54.94,63.25 54.94,63.02 60.35,57.61 63.02,57.61 64.92,55.7 65.08,55.7 IC1.6
NMORTN
  Top 0.152: RN2.4 23.09,71.93 23.09,70.94 24.69,69.34 24.69,67.97 28.5,64.16 47.24,64.16 49.53,61.87 51.89,61.87 52.05,61.72 58.45,61.72 59.97,63.25 IC1.11
  Bottom 0.152: IC1.4 60.05,55.63 60.66,55.63 62.18,54.1 65.46,54.1 65.99,54.63 65.99,57.3 60.05,63.25 IC1.11
NMTRTN
  Top 0.152: 55.82,57.04 61.65,62.87 61.65,65.38 62.64,66.37 62.64,67.74 63.17,68.28 63.93,68.28 65.08,67.13 65.08,63.32 IC1.9 | 55.82,57.04 54.94,56.16 54.94,55.7 IC1.2 | 55.82,57.04 53.72,59.13 48.01,59.13 45.49,61.65 28.42,61.65 22.1,67.97 22.1,69.34 20.57,70.87 20.57,71.93 RN2.3
RLY
  Bottom 0.152: R1.2 34.52,34.06 34.52,35.74 36.2,37.41 36.2,49.84 38.79,52.43 38.79,59.66 44.58,65.46 MC1.P$9
RLYDRV
  Top 0.152: R1.1 39.47,34.06 36.58,36.96 34.52,36.96 R2.2 34.44,37.03 31.93,37.03 26.44,42.52 26.06,42.52 T1.B
RLYOUT  (via drill 0.3)
  Top 0.152: v17.91,48.39 16.76,47.24 16.23,47.24 11.58,42.6 10.97,42.6 K1.10 | v17.91,60.66 17.22,60.66 16.84,61.04 v16.84,64.16 | v21.57,78.03 v18.97,75.44
  Bottom 0.152: v17.91,60.66 v17.91,48.39 | v16.84,64.16 16.84,65.3 16.38,65.76 16.38,72.85 v18.97,75.44 | v21.57,78.03 26.14,82.6 26.14,86.18 28.35,88.39 61.11,88.39 65.08,84.43 65.08,83.59 64.39,82.91 61.11,82.91 60.05,83.97 J4**.1
RLYOUT1  (via drill 0.3)
  Top 0.152: v5.56,46.41 3.05,48.92 RZ3**.2 | v23.09,45.72 23.09,46.1 25.98,49 v25.98,52.05
  Bottom 0.152: v5.56,46.41 10.21,46.41 10.44,46.63 12.5,46.63 13.41,45.72 v23.09,45.72 | v25.98,52.05 25.98,60.66 27.51,62.18 27.51,85.04 27.43,85.11 27.43,86.56 28.65,87.78 58.22,87.78 61.95,84.05 J4**.2
RLYOUT2  (via drill 0.3)
  Top 0.152: v25.68,61.11 24.69,62.1 23.47,62.1 20.88,64.69 15.7,64.69 3.89,76.5 3.89,76.58 3.35,77.11 2.67,77.11 2.21,76.66 2.21,63.4 2.97,62.64 2.97,54.03 RZ4**.2
  Bottom 0.152: v25.68,61.11 25.68,66.06 27.2,67.59 27.2,84.89 27.13,84.96 27.13,86.72 28.5,88.09 59.89,88.09 63.93,84.05 J4**.3
RLYSNK
  Top 0.152: K1.9 13.49,42.52 16,40.01 25.98,40.01 T1.C 26.06,39.93 34.98,31.01 40.77,31.01 D2.A
RST
  Top 0.152: J5.5 3.05,75.06 3.05,74.83 16.54,61.34 16.54,60.88 17.83,59.59 25.15,59.59 29.34,55.4 MC1.P$13 29.41,55.4 44.58,55.4 MC1.P$22
RX  (via drill 0.3)
  Top 0.152: v28.35,77.11 25.91,74.68 20.65,74.68 17.98,72.01 RN2.2 | v38.25,54.25 43.13,54.25 44.58,52.81 MC1.P$14 44.65,52.81 47.47,55.63 52.35,55.63 IC1.1 | v55.17,36.35 55.17,30.18 51.97,26.98 51.97,25.38 50.44,23.85 50.44,22.78 SV3.3
  Bottom 0.152: v28.35,77.11 28.73,77.11 28.96,76.89 29.87,76.89 38.86,67.89 38.86,60.2 38.25,59.59 v38.25,54.25 | 55.17,36.5 54.1,36.5 51.74,38.86 51.74,55.02 52.35,55.63 IC1.1 | 55.17,36.5 57.38,36.5 59.13,38.25 59.66,38.25 OK1.7 | 55.17,36.5 v55.17,36.35
SCK  (via drill 0.3)
  Top 0.152: v5.71,66.83 5.71,54.18 10.21,49.68 10.21,46.56 v10.67,46.1
  Bottom 0.152: v5.71,66.83 5.71,69.65 3.05,72.31 3.05,72.47 J5.3 | v10.67,46.1 12.57,46.1 13.49,45.19 29.34,45.19 MC1.P$18
SCL  (via drill 0.3)
  Top 0.152: v18.52,56.31 11.28,49.07 DISP2.3 11.2,49 11.2,45.72 9.3,43.81 9.3,41.07 12.5,37.87 12.5,36.5 13.11,35.89 17.53,35.89 20.65,39.01 21.49,39.01 26.36,34.14 26.36,28.88 29.49,25.76 34.9,25.76 35.51,25.15 v35.51,20.73 | v18.52,60.12 23.01,60.12 23.77,60.88 JP2.4 23.85,60.88 24.31,60.88 28.57,56.62 29.87,56.62 31.24,57.99 v39.62,57.99 | v68.5,17.98 69.34,17.98 70.64,19.28 78.03,19.28 81,22.25 v81,32.84 81,44.65 86.03,49.68 86.03,67.44 85.04,68.43 85.04,68.96 J1.3 | v55.55,20.27 57.99,22.71 SV3.9
  Bottom 0.152: RN3.3 20.5,69.04 20.5,70.03 18.9,71.63 18.9,73 18.29,73.61 17.6,73.61 16.69,72.69 16.69,65.91 21.64,60.96 23.77,60.96 JP2.4 | v18.52,60.12 v18.52,56.31 | v39.62,57.99 44.58,62.94 MC1.P$10 | 81.11,32.96 80.09,33.98 RZ1***.1 80.09,34.06 81.92,35.89 81.92,37.95 R101.1 | 81.11,32.96 81.15,32.92 84.05,32.92 87.71,36.58 87.71,37.57 87.33,37.95 84.96,37.95 Q1.3 | v68.5,17.98 68.5,20.73 65,24.23 60.66,24.23 59.21,22.78 58.06,22.78 SV3.9 | 81.11,32.96 v81,32.84 | v35.51,20.73 46.79,20.73 47.24,20.27 v55.55,20.27
SCL3V  (via drill 0.3)
  Top 0.152: v82.07,43.28 82.07,45.26 88.7,51.89 89.31,51.89 89.84,51.36 89.84,50.6 89,49.76 89,49.53 DISP1.8
  Bottom 0.152: 84.77,36.84 81.99,34.06 RZ1***.2 | 84.77,36.84 84.96,37.03 86.94,37.03 Q1.2 | 84.77,36.84 84.2,37.41 84.2,37.57 81.99,39.78 81.99,41.99 R102.1 82.07,41.99 v82.07,43.28
SDA  (via drill 0.3)
  Top 0.152: v20.27,64.16 v17.37,61.27 | SV3.7 55.47,22.78 54.33,22.78 53.34,23.77 52.58,23.77 51.44,22.63 51.44,22.33 50.83,21.72 49.99,21.72 49.23,22.48 49.23,29.72 48.16,30.79 48.16,39.85 v48.39,40.08 48.92,40.08 51.05,42.22 51.05,43.59 54.79,47.32 v56.31,47.32 | v79.02,46.86 73.91,46.86 v72.85,45.8 | v19.2,47.78 20.27,47.78 24.61,43.43 35.13,43.43 36.65,41.91 37.26,41.91 v40.16,44.81
  Bottom 0.152: 21.68,65.57 23.77,63.48 JP2.5 | 21.68,65.57 18.29,68.96 17.98,68.96 RN3.2 | 17.34,47.82 17.37,47.85 v17.37,61.27 | 17.34,47.82 16.76,47.24 10.82,47.24 9.07,49 8.76,49 DISP2.4 | 21.68,65.57 v20.27,64.16 | Q2.3 84.89,52.05 81.99,52.05 R103.1 | R103.1 81.92,51.97 80.09,50.14 80.09,48.01 RZ2***.1 80.01,47.93 79.02,46.94 v79.02,46.86 | J1.2 85.04,70.94 85.04,70.48 86.03,69.49 86.03,64.54 83.9,62.41 79.32,62.41 78.79,61.87 78.79,55.47 81.99,52.27 81.99,52.12 R103.1 | v48.39,40.08 48.39,48.23 45.03,51.59 44.12,51.59 44.08,51.63 | 44.08,51.63 42.52,53.19 42.52,58.29 44.58,60.35 MC1.P$11 | v72.85,45.8 65.68,45.8 64.92,46.56 57.07,46.56 v56.31,47.32 | v19.2,47.78 17.37,47.78 17.34,47.82 | v40.16,44.81 40.16,47.7 44.08,51.63
SDA3V
  Bottom 0.152: 87.06,49.87 88.92,48.01 DISP1.7 | 87.06,49.87 87.02,49.91 87.02,50.98 Q2.2 87.02,51.05 82.14,55.93 81.99,55.93 R104.1 | 87.06,49.87 85.19,48.01 81.99,48.01 RZ2***.2
THS  (via drill 0.3)
  Top 0.152: v26.29,67.44 27.43,67.44 29.34,65.53 MC1.P$26 | v46.79,28.42 v48.46,26.75
  Bottom 0.152: v26.29,67.44 25.22,67.44 23.7,68.96 23.09,68.96 RN3.4 | v48.46,26.75 50.37,26.75 51.82,25.3 52.96,25.3 SV3.6 | v46.79,28.42 45.11,28.42 40.46,33.07 34.06,33.07 33.53,33.6 33.53,39.47 35.36,41.3 35.36,43.97 | 35.36,43.97 35.36,59.51 29.41,65.46 MC1.P$26 | 35.36,43.97 28.88,43.97 28.73,44.12 18.14,44.12 12.5,38.48 12.5,36.5 12.95,36.04 12.95,31.47 J10.2
TX
  Top 0.152: IC1.3 57.45,55.63 56.84,55.63 55.02,53.8 48.16,53.8 44.65,50.29 MC1.P$15
  Bottom 0.152: IC1.3 57.53,55.7 58.06,55.7 59.66,57.3 60.88,57.3 62.48,55.7 IC1.5 | SV3.1 47.93,22.78 49.07,22.78 50.52,24.23 55.93,24.23 57,25.3 57,25.68 59.74,28.42 60.05,28.42 60.66,29.03 60.66,33.6 59.89,34.37 51.36,34.37 42.6,43.13 42.6,48.23 44.58,50.22 MC1.P$15
V+  (via drill 0.3)
  Top 1.016: C2.1 23.47,27.96 24.69,26.75 24.69,24 C1.1 24.23,23.77 21.83,21.37 | 21.83,21.37 20.95,20.5 18.67,20.5 V1.IN | v46.41,83.06 46.41,86.33 45.26,87.48 28.73,87.48 27.74,86.49 27.74,83.59 22.55,78.41 22.55,76.05 J0.3 | v51.13,77.5 51.13,73.99 55.24,69.88 v56.46,69.88 | v61.04,69.88 70.94,69.88 73.61,67.21 v78.11,67.21 | 21.83,21.37 33.76,9.45 64.54,9.45 68.12,13.03 68.12,15.7 70.64,18.21 83.36,18.21 87.63,22.48 87.94,22.48 JP5.3
  Bottom 1.016: D1.C 33.15,28.04 30.4,28.04 29.11,29.34 24.77,29.34 23.47,28.04 C2.1 | 78.03,26.75 78.94,26.75 81.15,24.54 81.15,18.97 81.92,18.21 83.36,18.21 87.63,22.48 87.94,22.48 JP5.3 | 78.03,26.75 72.69,26.75 71.86,25.91 71.86,24.61 73.23,23.24 73.23,22.78 JP1.1 | v46.41,83.06 51.13,78.33 v51.13,77.5 | v61.04,69.88 v56.46,69.88 | v78.11,67.21 78.11,65.46 78.49,65.08 78.49,62.64 78.03,62.18 78.03,26.75
VCC  (via drill 0.3)
  Top 0.508: v5.79,71.32 3.05,71.32 J5.2 | MC1.P$23 29.34,57.91 29.34,58.52 25.15,62.71 25.15,64.01 22.71,66.45 17.98,66.45 15.47,68.96 RN3.1 | JP2.1 23.77,53.26 18.14,53.26 13.95,49.07 13.79,49.07 DISP2.2 13.72,48.77 13.72,47.55 9.83,43.66 9.83,41.22 13.41,37.64 13.41,37.49 K1.2 | J2.2 6.02,32.99 13.41,32.99 14.94,31.47 J10.3 | SV3.13 63.17,22.78 63.17,23.62 66.83,27.28 66.83,32.61 67.44,33.22 C6.1 67.59,33.45 68.58,34.44 68.58,37.87 65.38,41.07 65.38,43.13 RN4.7 | v58.37,41.3 60.2,43.13 RN4.5 | JP1.3 75.82,22.78 74.6,24 74.6,25.76 80.01,31.17 v80.01,35.28 80.01,39.01 | v52.2,68.58 52.58,68.96 56.84,68.96 57.38,69.49 57.38,70.33 53.42,74.3 IC2.14 | C9.1 76.43,69.72 73.08,69.72 C8.1 72.77,69.8 70.64,71.93 59.89,71.93 v59.44,71.48 | J1.5 84.96,65 84.96,58.29 v80.09,53.42 80.01,53.19 80.01,39.01 | 80.01,39.01 v76.05,39.01 | v56.16,33.83 56.16,35.89 56.39,36.12 56.39,37.49 57.15,38.25 OK1.8
  Bottom 0.508: v5.79,71.32 14.78,71.32 15.39,71.93 RN2.1 14.86,71.09 15.39,70.56 15.39,69.04 RN3.1 15.54,68.81 15.54,64.16 22.4,57.3 22.4,54.71 23.77,53.34 JP2.1 | 30.25,33.91 30.25,39.93 C5.1 | 30.25,33.91 33.15,31.01 D2.C 33.45,31.01 38.86,31.01 40.46,29.41 43.43,29.41 45.19,27.66 47.47,27.66 49.23,29.41 50.98,29.41 52.58,31.01 52.58,32.31 54.1,33.83 v56.16,33.83 | K1.2 13.49,37.41 13.49,32.92 14.94,31.47 J10.3 15.16,31.62 16,32.46 27.28,32.46 28.65,33.83 30.02,33.83 30.25,33.91 | 57.15,41.22 57.15,38.33 OK1.8 | 57.15,41.22 55.24,43.13 RN4.3 | RN4.5 60.27,43.2 60.66,43.2 62.41,44.96 63.55,44.96 65.3,43.2 RN4.7 | C6.1 67.51,33.3 68.58,34.37 68.58,35.51 72.01,38.94 73,38.94 VCCBRIDGE***.2 73.23,39.01 v76.05,39.01 | v58.37,41.3 57.38,41.3 57.15,41.22 | v80.01,35.28 80.01,37.95 R101.2 | JP5.2 87.94,19.96 86.41,19.96 83.74,17.3 81.31,17.3 75.89,22.71 JP1.3 | C7.1 49.07,58.29 49.68,58.29 52.43,61.04 52.43,63.25 IC1.14 52.2,63.48 v52.2,68.58 | v80.09,53.42 80.09,52.05 R103.2 | C9.1 76.5,69.8 76.81,69.8 79.78,72.77 82.22,72.77 83.74,71.25 83.74,66.29 84.96,65.08 J1.5 | v59.44,71.48 56.54,71.48 53.72,74.3 53.42,74.3 IC2.14
VCC/2  (via drill 0.3)
  Top 1.016: SV1.4 55.7,80.31 56.24,80.31 57.61,81.69 59.28,81.69 60.66,80.31 SV1.8 61.11,80.62 62.18,81.69 63.86,81.69 65.23,80.31 65.76,80.31 SV1.12 | RN4.1 50.06,43.13 47.4,40.46 47.4,32.69 45.49,30.79 45.49,30.56 R3.2 45.8,30.1 45.8,22.78 v47.32,21.26 | v64.16,21.26 70.41,21.26 | 70.41,21.26 76.43,21.26 77.88,22.71 78.33,22.71 JP1.5 | v69.65,49.91 69.65,38.56 70.41,37.8 70.41,21.26
  Bottom 1.016: SV1.12 65.84,80.31 67.21,81.69 68.89,81.69 70.26,80.31 70.87,80.31 SV1.16 71.02,79.78 71.02,79.55 72.31,78.26 72.31,75.06 69.95,72.69 69.95,65.53 69.88,65.46 69.88,56.92 69.65,56.69 v69.65,49.91 | v47.32,21.26 v64.16,21.26
VCC/VDD  (via drill 0.3)
  Top 0.508: DISP1.5 88.92,45.03 87.94,46.02 87.94,49.99 88.92,50.98 DISP1.9 | C11.1 79.7,61.49 v73.08,54.86 73,54.63 73,47.02 71.7,45.72 v71.7,37.57
  Bottom 0.508: v73.08,54.86 73.08,52.96 VDDBRIDGE.1 | DISP1.9 88.92,51.05 88.92,52.5 79.93,61.49 79.78,61.49 C11.1 | C13.1 82.45,14.48 79.4,17.53 76.81,17.53 70.94,23.39 70.94,26.29 72.54,27.89 72.54,28.65 72.01,29.18 70.79,29.18 68.66,31.32 68.66,31.93 73,36.27 73,37.03 VCCBRIDGE***.1 72.77,37.11 72.31,37.57 v71.7,37.57
VDD  (via drill 0.3)
  Top 0.508: v80.31,54.71 v76.66,51.05 | v48.46,83.13 59.13,83.13 59.66,82.6 65.08,82.6 67.21,80.47 67.21,79.78 68.12,78.87 68.81,78.87 69.72,77.95 69.72,77.11 v73.38,73.46 | v76.66,46.25 v79.02,43.89
  Bottom 0.508: Q1.1 86.94,39.01 86.94,39.47 82.37,44.04 81.76,44.04 80.09,42.37 80.09,42.06 R102.2 80.16,42.75 v79.02,43.89 | Q2.1 86.94,52.96 83.06,56.84 83.06,56.92 82.75,57.23 81.08,57.23 80.09,56.24 80.09,56.01 R104.2 80.16,55.78 80.31,55.63 v80.31,54.71 | v48.46,83.13 47.09,84.51 47.09,85.34 45.19,87.25 28.8,87.25 27.96,86.41 27.96,85.27 29.34,83.9 29.34,83.29 MC1.P$33 | v73.38,73.46 74.14,72.69 74.14,67.36 71.78,65 71.78,52.12 72.77,51.13 VDDBRIDGE.2 73.08,51.05 v76.66,51.05 v76.66,46.25
VIN  (via drill 0.3)
  Top 1.016: v71.63,28.27 73.23,26.67 73.23,25.3 JP1.2 | v65.15,33.53 63.32,33.53 v63.17,33.38 | v59.97,35.43 59.97,33.98 v59.59,33.6 | v53.95,32.38 51.36,32.38 50.83,31.85 49.68,31.85 v48.92,31.09 | v36.96,42.67 29.41,50.22 MC1.P$20
  Bottom 1.016: v71.63,28.27 70.41,28.27 v65.15,33.53 | v63.17,33.38 62.41,33.38 60.35,35.43 v59.97,35.43 | v59.59,33.6 57.3,33.6 56.08,32.38 v53.95,32.38 | v48.92,31.09 46.79,31.09 45.72,32.16 43.28,32.16 39.78,35.66 38.94,35.66 36.96,37.64 v36.96,42.67
VOUT
  Top 1.016: F1.2 39.55,23.93 39.55,22.94 51.82,10.67 59.82,10.67 69.19,20.04 77.72,20.04 79.86,22.17 79.86,23.77 78.41,25.22 JP1.6 77.88,25.3 75.89,25.3 JP1.4
VOUTRAW  (via drill 0.3)
  Top 1.016: RZ3**.1 3.05,47.02 3.05,45.95 5.94,43.05 J3.2 | B.1 21.49,33.98 19.2,33.98 19.05,33.83 JP4.2 | K1.5 21.11,37.41 21.11,34.44 B.1 | 23.05,32.35 21.79,33.6 B.1 | 23.05,32.35 23.39,32 23.39,31.01 C3.1 | 23.05,32.35 24.69,33.98 C4.1 | v43.51,33.6 v43.51,28.04 | v41.68,35.43 41.68,34.21 40.08,32.61 37.72,32.61 34.67,35.66 31.39,35.66 v29.34,37.72
  Bottom 1.016: K1.6 21.11,42.52 21.11,37.49 K1.5 | 18.67,26.21 18.67,25.6 V1.OUT | 18.67,26.21 23.39,30.94 C3.1 | v43.51,28.04 40.84,28.04 D1.A | v41.68,35.43 v43.51,33.6 | v29.34,37.72 28.8,37.72 25.15,34.06 24.77,34.06 C4.1 | J3.2 6.02,42.98 6.55,42.44 6.63,42.44 9.53,39.55 9.53,30.79 13.87,26.44 18.21,26.44 18.67,26.21
VOUTRAW2
  Top 1.016: RZ4**.1 3.05,52.05 3.05,51.36 8.53,45.87 8.53,39.85 10.9,37.49 K1.1 11.05,36.96 11.81,36.2 11.81,36.12 15.01,32.92 16.99,32.92 18.52,31.39 JP4.1 19.05,31.17 19.2,31.01 21.49,31.01 A.1 21.87,30.71 22.94,29.64 23.7,29.64 29.34,24 34.44,24 F1.1

## Text on the board
tNames: DC12V | USB | NO | NC | GeekPort II | Min. requirement for / MIDI IN | 2-M2.5 | G | RST | A | MKR | R | O | T | O2 | LED | C | SPI | 0 | GND | Pineapple IIb | 2.6.7-RC | Do not forget / installing RN2 / to use MIDI | A3 | A2 | L0 | V | SDA | I | 1 | 4066 | A0 | A1 | SCL | 2 | 103 | 104 | 1 | 2-472 | I2C | THS* | D7 | 0 | N | 3 | Vcc | N | 7406 | SD | I/O | L1 | G | L0 | 104 | SC | Akizuki / AQM0802A-RN-GBW | SparkFun / Real Time Clock / Module (12708) | NC | To use / J4** | G | 103 | 5V | 4 | 5 | 9 | 221 | RTC | Min. requirement for / MIDI OUT | PWRSEL | THRU | THRU | OUT2 | OUT2 | SD | SC | 5V | G | DISP | Dual Regulator | Adafruit SSD1306 | Vout | Arduino Micro | Vout | Single Regulator | GND | TLP2630 | G5V-1 | 103 | MC1 | 104 | LED00 / monitors / Vcc/2 | Arduino Only | 1 | G1 | GPIO | 473 | 102 | G0 | LED | 104 | 1u | 102 | 102 | LED00 | Direct 5V | Vcc | 103 | GND | RLY | 102 | AREF | G | TH* | V | PWRSEL | REG | G0 | G1 | TH | 00 | 01 | 02 | 03 | Vin | Vout | Vout | DS18B20+ | 12V | 2 | TestPort II | 1u | 1 | 22u | 470n | THRU | TX | RX | G | SD | SC | D7 | V | V+ | Vcc | Vcc/2 | Vcc | 4-M2.3 | 1u | Designed for / Takachi / PF10-4-10 | GND | IN | OUT
bNames: N.O. | C. | N.C. | Vdd | 1 | 2 | 3 | V+ | IN | OUT | SPI | MIDI | I2C/THS*/MNTR | MKR | THS* | GPIO | MIDI OUT | 4-103 | Vcc | 3.3V I2C | Vin | IN | OUT | Relay-N.O. | Relay-Common | 2-BSS138 | Vcc/2 | RLY | 5V I2C*** | RLY | GPIO | Relay-N.C. | MIDI IN | Vcc | THS* | V+ | Vin | Vo | Vo | Vout | V+ | Vcc | V/2 | PWR | V+ | MIDI IN | MIDI OUT